# EAGLE board CT_schematic (EAGLE 7.6.0)

Size 100 x 80 mm. Coordinates in mm from the lower left corner, seen from the top.
Outline: 0,0 100,0 100,80 0,80 0,0
Copper layers (1*16): Top 0.035mm / dielectric 1.5mm / Bottom 0.035mm
Design rules "default": minimum track width 10mil, minimum drill 24mil, track to track 8mil, track to pad 8mil, pad to pad 8mil, via to via 8mil, smd to smd 8mil, copper to edge 40mil, drill to drill 8mil, minimum pad ring 10mil, minimum via ring 8mil, stop-mask expansion 4mil, vias tented up to drill 0mil, thermal gap 10mil

## Footprints (pad centres in the part's own frame; a part is rotated, then mirrored left to right if it is on the bottom)
C0603 = smd 0.8 x 0.8: 1 -0.762,0; 2 0.762,0
C0402 = smd 0.5 x 0.5: 1 -0.508,0; 2 0.508,0
C1210 = smd 1.2 x 2.5: 1 -1.524,0; 2 1.524,0
C0805 = smd 1.2 x 1.3: 1 -1.016,0; 2 1.016,0
C1206 = smd 1.3 x 1.6: 1 -1.524,0; 2 1.524,0
L0603 = smd 0.8 x 0.8: 1 -0.762,0; 2 0.762,0
DR1040 = smd 1.6 x 3.2: 1 -4.458,0; 2 4.458,0
R0603 = smd 0.8 x 0.8: 1 -0.762,0; 2 0.762,0
WLCSP49 = smd 0.25 x 0.25: A1 -1.2,1.2; A2 -0.8,1.2; A3 -0.4,1.2; A4 0,1.2; A5 0.4,1.2; A6 0.8,1.2; A7 1.2,1.2; B1 -1.2,0.8; B2 -0.8,0.8; B3 -0.4,0.8; B4 0,0.8; B5 0.4,0.8; B6 0.8,0.8; B7 1.2,0.8; C1 -1.2,0.4; C2 -0.8,0.4; C3 -0.4,0.4; C4 0,0.4; C5 0.4,0.4; C6 0.8,0.4; C7 1.2,0.4; D1 -1.2,0; D2 -0.8,0; D3 -0.4,0; D4 0,0; D5 0.4,0; D6 0.8,0; D7 1.2,0; E1 -1.2,-0.4; E2 -0.8,-0.4; E3 -0.4,-0.4; E4 0,-0.4; E5 0.4,-0.4; E6 0.8,-0.4; E7 1.2,-0.4; F1 -1.2,-0.8; F2 -0.8,-0.8; F3 -0.4,-0.8; F4 0,-0.8; F5 0.4,-0.8; F6 0.8,-0.8; F7 1.2,-0.8; G1 -1.2,-1.2; G2 -0.8,-1.2; G3 -0.4,-1.2; G4 0,-1.2; G5 0.4,-1.2; G6 0.8,-1.2; G7 1.2,-1.2
TDFN-8/6MM = smd 0.3 x 0.75: 1 0,0; 2 0.5,0; 3 1,0; 4 1.5,0; 5 1.5,3; 6 1,3; 7 0.5,3; 8 0,3
QFN-28 = smd 0.813 x 0.305: 1 -2.451,1.5; 2 -2.451,1; 3 -2.451,0.5; 4 -2.451,0; 5 -2.451,-0.5; 6 -2.451,-1; 7 -2.451,-1.5; 15 2.451,-1.5; 16 2.451,-1; 17 2.451,-0.5; 18 2.451,0; 19 2.451,0.5; 20 2.451,1; 21 2.451,1.5 | smd 0.305 x 0.813: 8 -1.5,-2.451; 9 -1,-2.451; 10 -0.5,-2.451; 11 0,-2.451; 12 0.5,-2.451; 13 1,-2.451; 14 1.5,-2.451; 22 1.5,2.451; 23 1,2.451; 24 0.5,2.451; 25 0,2.451; 26 -0.5,2.451; 27 -1,2.451; 28 -1.5,2.451 | smd 3.607 x 3.607: 29 0,0
SJ-43515TS-SMT-TR = smd 2.2 x 3: 1 0.6,-7.4; 4 3.4,-7.4 | smd 3 x 3: 2 12.8,-7.4; 5 17,-3 | smd 2 x 3: 3 5.3,0; 6 2.5,0 | drill 1.8: P$7 4.5,-3.69; P$8 11.54,-3.69
ABS07-32.768KHZ-7-T = smd 1.1 x 2.4: 1 -2.5,0; 2 0,0
ASFL1 = smd 1.7 x 1.5: 1 -1.27,-1.1; 2 1.27,-1.1; 3 1.27,1.1; 4 -1.27,1.1
ASDMB-XX.XXXXMHZ-XX-XX-XXX = smd 0.65 x 0.85: 1 0.45,0.2; 2 2.05,0.2; 3 2.05,1.8; 4 0.45,1.8
TSOT-23-5 = smd 1.3 x 0.62: 1 -1.31,0.95; 2 -1.31,0; 3 -1.31,-0.95; 4 1.31,-0.95; 5 1.31,0.95
SOIC-8_EP = smd 1.6 x 0.533: 1 -2.921,1.905; 2 -2.921,0.635; 3 -2.921,-0.635; 4 -2.921,-1.905; 5 2.921,-1.905; 6 2.921,-0.635; 7 2.921,0.635; 8 2.921,1.905 | smd 2.54 x 3.302: EPAD 0,0 | drill 0.406 pad 0.406: P$1 -0.508,0.635; P$2 0.381,0.635; P$3 -0.508,-0.635; P$4 0.381,-0.635
DFN8_2X3MC = smd 0.813 x 0.305: 1 -1.398,0.75; 2 -1.398,0.25; 3 -1.398,-0.25; 4 -1.398,-0.75; 5 1.398,-0.75; 6 1.398,-0.25; 7 1.398,0.25; 8 1.398,0.75 | smd 1.753 x 1.549: 9 0,0
JST-2-SMD = smd 1 x 4.6: 1 -1,-3.7; 2 1,-3.7 | smd 1.6 x 3.4: NC1 -3.4,1.5; NC2 3.4,1.5
FCI_10118193-0001LF = smd 0.4 x 1.35: 1 -1.3,2.675; 2 -0.65,2.675; 3 0,2.675; 4 0.65,2.675; 5 1.3,2.675 | smd 1.6 x 1.4: 6 -3.2,2.45; 7 3.2,2.45 | smd 1.9 x 1.9: 8 -1.2,0; 9 1.2,0 | hole 0.5: -3.3,0; 3.3,0
SON-6 = smd 0.55 x 0.3: 1 -0.355,0.5 | smd 0.52 x 0.3: 2 -0.37,0; 3 -0.37,-0.5; 4 0.37,-0.5; 5 0.37,0; 6 0.37,0.5
SW_4-1437565-2 = smd 1.4 x 2.1: 1 -2.23,4.55; 2 -2.23,-4.55; 3 2.23,4.55; 4 2.23,-4.55
LGM67K-G1J2-24-Z = smd 0.8 x 1.4: A -2,0; C 0,0
NC7SZ125M5X = smd 1.3 x 0.7: 1 -1.3,0.95; 2 -1.3,0; 3 -1.3,-0.95; 4 1.3,-0.95; 5 1.3,0.95

## Placement (x,y rotation side)
C1  1e-06  [C0603]  -19.05,71.12 0 top  (outside the outline)
C2  1e-07  [C0603]  -22.86,71.12 0 top  (outside the outline)
C3  1e-07  [C0603]  -26.67,71.12 0 top  (outside the outline)
C4  1e-07  [C0603]  -30.48,71.12 0 top  (outside the outline)
C5  1e-07  [C0603]  -34.29,71.12 0 top  (outside the outline)
C6  1e-07  [C0603]  -38.1,71.12 0 top  (outside the outline)
C7  4.7e-06  [C0603]  -15.24,71.12 0 top  (outside the outline)
C8  1e-08  [C0603]  -41.91,71.12 0 top  (outside the outline)
C9  1e-06  [C0603]  -45.72,71.12 0 top  (outside the outline)
C10  1e-11  [C0402]  -22.86,76.2 0 top  (outside the outline)
C11  1e-11  [C0402]  -26.67,76.2 0 top  (outside the outline)
C12  1e-08  [C0402]  -30.48,76.2 0 top  (outside the outline)
C13  2.2e-05  [C1210]  -66.04,46.99 0 top  (outside the outline)
C14  2.2e-05  [C1210]  -72.39,46.99 0 top  (outside the outline)
C15  1e-09  [C0402]  -34.29,76.2 0 top  (outside the outline)
C16  1e-09  [C0402]  -38.1,76.2 0 top  (outside the outline)
C17  1e-07  [C0402]  -41.91,76.2 0 top  (outside the outline)
C18  1e-07  [C0402]  -45.72,76.2 0 top  (outside the outline)
C19  1e-07  [C0402]  -49.53,76.2 0 top  (outside the outline)
C20  1e-07  [C0402]  -53.34,76.2 0 top  (outside the outline)
C21  1e-07  [C0402]  -57.15,76.2 0 top  (outside the outline)
C22  1e-05  [C0805]  -59.69,53.34 0 top  (outside the outline)
C23  1e-05  [C0805]  -64.77,53.34 0 top  (outside the outline)
C24  1e-05  [C0805]  -69.85,53.34 0 top  (outside the outline)
C25  1e-05  [C0805]  -15.24,60.96 0 top  (outside the outline)
C26  1e-05  [C0805]  -20.32,60.96 0 top  (outside the outline)
C27  1e-08  [C0402]  -60.96,76.2 0 top  (outside the outline)
C28  1e-08  [C0402]  -64.77,76.2 0 top  (outside the outline)
C29  1e-05  [C0805]  -25.4,60.96 0 top  (outside the outline)
C30  1e-05  [C0805]  -30.48,60.96 0 top  (outside the outline)
C31  1e-05  [C1210]  -16.51,54.61 0 top  (outside the outline)
C32  1e-05  [C1210]  -22.86,54.61 0 top  (outside the outline)
C33  1e-05  [C1210]  -29.21,54.61 0 top  (outside the outline)
C34  1e-05  [C1210]  -35.56,54.61 0 top  (outside the outline)
C35  1e-07  [C0402]  -68.58,76.2 0 top  (outside the outline)
C36  1e-05  [C1206]  -41.91,54.61 0 top  (outside the outline)
C37  1e-05  [C1206]  -48.26,54.61 0 top  (outside the outline)
C38  1e-08  [C0402]  -72.39,76.2 0 top  (outside the outline)
F1  240.0  [L0603]  -49.53,71.12 0 top  (outside the outline)
I1  5.2e-06  [DR1040]  -38.1,27.94 0 top  (outside the outline)
R1  10000.0  [R0603]  -71.12,59.69 0 top  (outside the outline)
R2  1000.0  [R0603]  -53.34,71.12 0 top  (outside the outline)
R3  910.0  [R0603]  -57.15,71.12 0 top  (outside the outline)
R4  4700.0  [R0603]  -60.96,71.12 0 top  (outside the outline)
R5  2200.0  [R0603]  -64.77,71.12 0 top  (outside the outline)
R6  2200.0  [R0603]  -68.58,71.12 0 top  (outside the outline)
R7  10000.0  [R0603]  -15.24,66.04 0 top  (outside the outline)
R8  10000.0  [R0603]  -20.32,66.04 0 top  (outside the outline)
R9  10000.0  [R0603]  -25.4,66.04 0 top  (outside the outline)
R10  10000.0  [R0603]  -30.48,66.04 0 top  (outside the outline)
R11  10000.0  [R0603]  -35.56,66.04 0 top  (outside the outline)
R12  47000.0  [R0603]  -40.64,66.04 0 top  (outside the outline)
R13  47000.0  [R0603]  -45.72,66.04 0 top  (outside the outline)
R14  47000.0  [R0603]  -50.8,66.04 0 top  (outside the outline)
R15  680.0  [R0603]  -72.39,71.12 0 top  (outside the outline)
R16  490000.0  [R0603]  -55.88,59.69 0 top  (outside the outline)
R17  1000000.0  [R0603]  -50.8,59.69 0 top  (outside the outline)
R18  4031.5447154472  [R0603]  -45.72,59.69 0 top  (outside the outline)
R19  2200.0  [R0603]  -15.24,76.2 0 top  (outside the outline)
R20  10000.0  [R0603]  -55.88,66.04 0 top  (outside the outline)
R21  10000.0  [R0603]  -60.96,66.04 0 top  (outside the outline)
R22  82000.0  [R0603]  -66.04,66.04 0 top  (outside the outline)
R23  300000.0  [R0603]  -60.96,59.69 0 top  (outside the outline)
R24  120000.0  [R0603]  -66.04,59.69 0 top  (outside the outline)
R25  2000.0  [R0603]  -19.05,76.2 0 top  (outside the outline)
R26  10000.0  [R0603]  -71.12,66.04 0 top  (outside the outline)
U1  STM32F318C8Y6  [WLCSP49]  -55.88,38.1 0 top  (outside the outline)
U2  24AA64T-I/MNY  [TDFN-8/6MM]  -69.85,25.4 0 top  (outside the outline)
U3  WM8731CLSEFL  [QFN-28]  -58.42,46.99 0 top  (outside the outline)
U4  SJ-43515TS-SMT-TR  [SJ-43515TS-SMT-TR]  -45.72,10.16 0 top  (outside the outline)
U5  SJ-43515TS-SMT-TR  [SJ-43515TS-SMT-TR]  -73.66,10.16 0 top  (outside the outline)
U6  ABS07-32.768KHZ-7-T  [ABS07-32.768KHZ-7-T]  -27.94,46.99 0 top  (outside the outline)
U7  ASFL1-12.288MHZ-EC-T  [ASFL1]  -30.48,38.1 0 top  (outside the outline)
U8  ASDMB-25.000MHZ-EC-T  [ASDMB-XX.XXXXMHZ-XX-XX-XXX]  -16.51,1.27 0 top  (outside the outline)
U9  ltc3406es5  [TSOT-23-5]  -35.56,59.69 0 top  (outside the outline)
U10  MIC5234YME  [SOIC-8_EP]  -36.83,46.99 0 top  (outside the outline)
U11  MCP73831T-2ACI/MC  [DFN8_2X3MC]  -20.32,80.01 0 top  (outside the outline)
U12  S2B-PH-SM4-TB(LF)(SN)  [JST-2-SMD]  -53.34,27.94 0 top  (outside the outline)
U13  10118193-0001LF  [FCI_10118193-0001LF]  -39.37,38.1 0 top  (outside the outline)
U14  TPS3895ADRYR  [SON-6]  -13.97,80.01 0 top  (outside the outline)
U15  4-1437565-2  [SW_4-1437565-2]  -27.94,27.94 0 top  (outside the outline)
U16  Q65110A2395  [LGM67K-G1J2-24-Z]  -45.72,46.99 0 top  (outside the outline)
U17  nc7sz125m5x  [NC7SZ125M5X]  -53.34,53.34 0 top  (outside the outline)

## Library data of the parts
C1-C38 F1 I1 R1-R26 U1-U17 = circuit_tree

## Nets
CLK_CRYSTAL_U1_C6: C10.1 U1.C6 U6.1
CLK_CRYSTAL_U1_C7: C11.1 U1.C7 U6.2
CLK_U1_D7: U1.D7 U8.3
CLK_U3_1: U3.1 U7.3
GND: C1.2 C2.2 C3.2 C4.2 C5.2 C6.2 C7.2 C8.2 C9.2 C10.2 C11.2 C12.2 C16.2 C17.2 C18.2 C19.2 C20.2 C21.2 C22.2 C23.2 C24.2 C25.2 C26.2 C27.2 C28.2 C29.2 C30.1 C30.2 C31.2 C32.2 C33.2 C34.2 C35.2 C36.2 C37.2 C38.2 R2.2 R7.2 R8.2 R10.2 R12.2 R13.2 R14.2 R16.2 R19.2 R22.2 R24.2 R25.2 U1.B1 U1.D3 U1.E6 U1.F7 U2.4 U2.7 U3.4 U3.15 U3.19 U3.25 U3.26 U3.29 U4.1 U5.1 U7.2 U8.2 U9.2 U10.7 U10.EPAD U11.6 U11.9 U12.2 U13.5 U13.6 U13.7 U13.8 U13.9 U14.2 U16.C U17.1 U17.3
INPUT_USBPOWER_5V: C36.1 R26.2 U11.1 U11.2 U13.1
NET_U1_A1: R6.1 U1.A1 U2.5
NET_U1_A2: R5.1 U1.A2 U2.6
NET_U1_A5: R7.1 U1.A5
NET_U1_A6: C8.1 C9.1 F1.1 U1.A6
NET_U1_E7: R4.1 U1.E7 U17.4
NET_U1_G3: R8.1 U1.G3
NET_U1_G6: R3.1 U1.G6 U16.A
NET_U1_G7: R1.1 U1.G7 U15.3 U15.4
NET_U2_1: R9.1 U2.1
NET_U2_2: R10.1 U2.2
NET_U2_3: R11.1 U2.3
NET_U3_9: U3.9
NET_U3_20: C21.1 C26.1 U3.20
NET_U4_2: C14.1 R13.1 U4.2
NET_U4_5: C13.1 R12.1 U4.5
NET_U4_13: C13.2
NET_U4_14: C14.2
NET_U5_5: C15.1 C16.1 R14.1 R15.1 U5.5
NET_U5_21: R15.2
NET_U5_22: C15.2
NET_U9_1: U9.1
NET_U9_3: I1.1 U9.3
NET_U9_5: R16.1 R17.1 U9.5
NET_U9_ATNET_3: I1.2 R17.2
NET_U10_4: R18.2 R19.1 U10.4
NET_U11_5: R26.1 U11.5
NET_U11_8: R25.1 U11.8
NET_U14_1: R21.1 R22.1 U14.1
NET_U14_3: R23.2 R24.1 U14.3
NET_U14_4: R20.1 U14.4 U17.2
NET_U15_1: R2.1 U15.1 U15.2
PROC_I2S2_CK: U1.D6 U3.7
PROC_I2S2_EXT_SD: U1.C2 U3.10
PROC_I2S2_SD: U1.C1 U3.8
PROC_I2S2_WS: U1.E2 U3.9 U3.11
VCC_S1_3V7: C29.1 C31.1 C32.1 C37.1 U9.4 U10.5 U10.8 U11.3 U11.4 U12.1
VCC_TIER1_1V8: C1.1 C2.1 C3.1 C4.1 C5.1 C6.1 C7.1 C12.1 C17.1 C18.1 C19.1 C20.1 C22.1 C23.1 C24.1 C25.1 C28.1 C30.2 C35.1 C38.1 F1.2 I1.2 R1.2 R3.2 R4.2 R5.2 R6.2 R9.2 R11.2 R17.2 R20.2 R21.2 R23.1 U1.B2 U1.B6 U1.B7 U1.F2 U2.8 U3.3 U3.5 U3.12 U3.18 U8.4 U14.6 U17.5
VCC_TIER1_3V3: C27.1 C33.1 C34.1 R18.1 U7.4 U10.1

## Tracks (layer width: path | path; a pad name or v marks a point on that pad's centre or on a via)
CLK_CRYSTAL_U1_C6  (2 unrouted)
CLK_CRYSTAL_U1_C7  (2 unrouted)
CLK_U1_D7  (1 unrouted)
CLK_U3_1  (1 unrouted)
GND  (78 unrouted)
INPUT_USBPOWER_5V  (4 unrouted)
NET_U1_A1  (2 unrouted)
NET_U1_A2  (2 unrouted)
NET_U1_A5  (1 unrouted)
NET_U1_A6  (3 unrouted)
NET_U1_E7  (2 unrouted)
NET_U1_G3  (1 unrouted)
NET_U1_G6  (2 unrouted)
NET_U1_G7  (3 unrouted)
NET_U2_1  (1 unrouted)
NET_U2_2  (1 unrouted)
NET_U2_3  (1 unrouted)
NET_U3_20  (2 unrouted)
NET_U4_2  (2 unrouted)
NET_U4_5  (2 unrouted)
NET_U5_5  (4 unrouted)
NET_U9_3  (1 unrouted)
NET_U9_5  (2 unrouted)
NET_U9_ATNET_3  (1 unrouted)
NET_U10_4  (2 unrouted)
NET_U11_5  (1 unrouted)
NET_U11_8  (1 unrouted)
NET_U14_1  (2 unrouted)
NET_U14_3  (2 unrouted)
NET_U14_4  (2 unrouted)
NET_U15_1  (2 unrouted)
PROC_I2S2_CK  (1 unrouted)
PROC_I2S2_EXT_SD  (1 unrouted)
PROC_I2S2_SD  (1 unrouted)
PROC_I2S2_WS  (2 unrouted)
VCC_S1_3V7  (9 unrouted)
VCC_TIER1_1V8  (44 unrouted)
VCC_TIER1_3V3  (5 unrouted)